# EAGLE board LPP_MainBoard_Gen_1_Ver_1 (EAGLE 7.5.0)
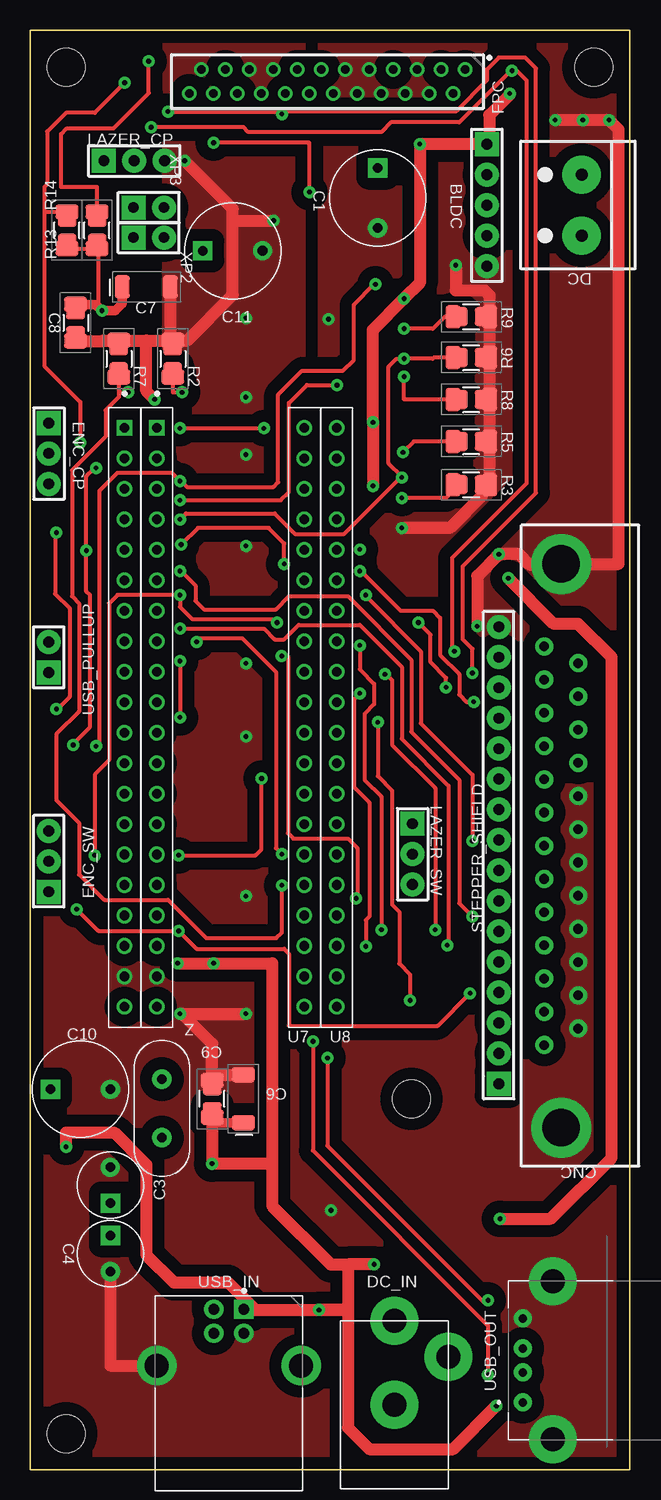
[diagram p0: board, top side]
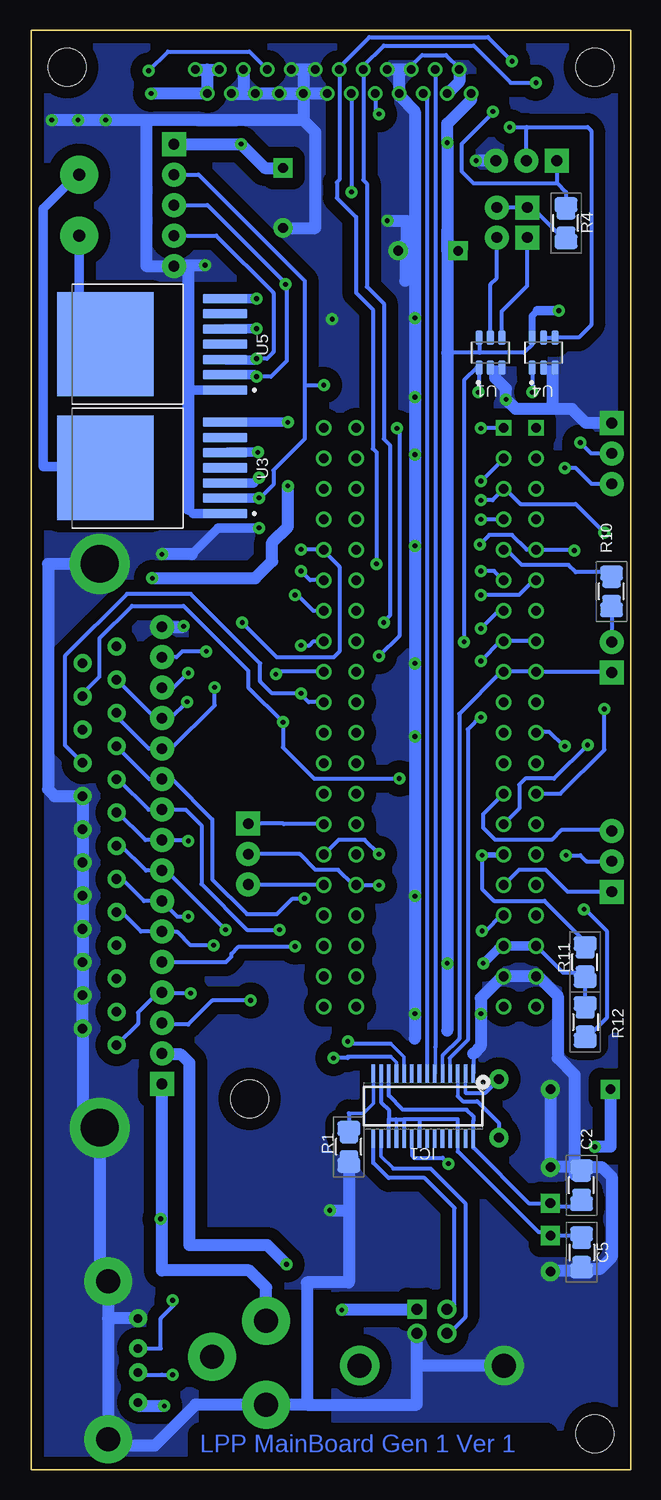
[diagram p1: board, bottom side, seen from below]

Size 50 x 120 mm. Coordinates in mm from the lower left corner, seen from the top.
Outline: 0,120 0,0 50,0 50,120 0,120
Copper layers (1*16): Верхний 0.035mm / dielectric 1.5mm / Нижний 0.035mm
Design rules "default *": minimum track width 10mil, minimum drill 0.61mm, track to track 8mil, track to pad 8mil, pad to pad 8mil, via to via 8mil, smd to smd 8mil, copper to edge 40mil, drill to drill 8mil, minimum pad ring 0mil, minimum via ring 8mil, stop-mask expansion 0mil, vias tented up to drill 31mil, thermal gap 10mil
Net classes: 0 Default: width 0.33 mm, clearance 0.33 mm
Holes 3.15 mm at 3,3 3,116.9 47,116.9 31.8,30.9

## Footprints (pad centres in the part's own frame; a part is rotated, then mirrored left to right if it is on the bottom)
PLS_5 = drill 0.9 pad 2 square: 1 -5.08,0 | drill 0.9 pad 2: 2 -2.54,0; 3 0,0; 4 2.54,0; 5 5.08,0
CAP_P_5mm = drill 0.8 pad 1.6 square: 1 -2.5,0 | drill 0.8 pad 1.6: 2 2.5,0
СAP_0805_1206 = smd 1.26 x 1.92: 1@ -1.525,0; 2@ 1.525,0 | smd 1.21 x 1.57: 1@_1 -0.9,0; 2@_1 0.9,0
CAP_P_3mm = drill 0.8 pad 1.6 square: 1 -1.5,0 | drill 0.8 pad 1.6: 2 1.5,0
CAP_P_3mm_C4 = drill 0.8 pad 1.6 square: 1 -1.5,0 | drill 0.8 pad 1.6: 2 1.5,0
СAP_0805_1206_C5 = smd 1.26 x 1.92: 1@ -1.525,0; 2@ 1.525,0 | smd 1.21 x 1.57: 1@_1 -0.9,0; 2@_1 0.9,0
СAP_P_SMD_5mm = smd 1.26 x 1.92: 1@ -2,0; 2@ 2,0
СAP_P_SMD_5mm_C7 = smd 1.26 x 1.92: 1@ -2,0; 2@ 2,0
СAP_0805_1206_C8 = smd 1.26 x 1.92: 1@ -1.525,0; 2@ 1.525,0 | smd 1.21 x 1.57: 1@_1 -0.9,0; 2@_1 0.9,0
СAP_0805_1206_C9 = smd 1.26 x 1.92: 1@ -1.525,0; 2@ 1.525,0 | smd 1.21 x 1.57: 1@_1 -0.9,0; 2@_1 0.9,0
CAP_P_5mm_C10 = drill 0.8 pad 1.6 square: 1 -2.5,0 | drill 0.8 pad 1.6: 2 2.5,0
CAP_P_5mm_C11 = drill 0.8 pad 1.6 square: 1 -2.5,0 | drill 0.8 pad 1.6: 2 2.5,0
DB25M = drill 0.8 pad 1.5: 1 16.612,1.422; 2 13.843,1.422; 3 11.074,1.422; 4 8.306,1.422; 5 5.537,1.422; 6 2.769,1.422; 7 0,1.422; 8 -2.769,1.422; 9 -5.537,1.422; 10 -8.306,1.422; 11 -11.074,1.422; 12 -13.843,1.422; 13 -16.612,1.422; 14 15.215,-1.422; 15 12.446,-1.422; 16 9.677,-1.422; 17 6.909,-1.422; 18 4.14,-1.422; 19 1.372,-1.422; 20 -1.397,-1.422; 21 -4.166,-1.422; 22 -6.934,-1.422; 23 -9.703,-1.422; 24 -12.471,-1.422; 25 -15.24,-1.422 | drill 3.15 pad 5: @26 23.5,0; @26_1 -23.5,0
2_Screw_Term._Blk. = drill 1 pad 3.175: 1 -2.54,0; 2 2.54,0
J-1 = drill 2 pad 4: 1 7,0; 2 0,0; 3 4,-4.5
PLS_3 = drill 0.9 pad 2 square: 1 -2.54,0 | drill 0.9 pad 2: 2 0,0; 3 2.54,0
PLS_3_ENC_SW = drill 0.9 pad 2 square: 1 -2.54,0 | drill 0.9 pad 2: 2 0,0; 3 2.54,0
FPC_24_1mm = drill 0.7 pad 1.2: 1 -1,12; 2 1,11; 3 -1,10; 4 1,9; 5 -1,8; 6 1,7; 7 -1,6; 8 1,5; 9 -1,4; 10 1,3; 11 -1,2; 12 1,1; 13 -1,0; 14 1,-1; 15 -1,-2; 16 1,-3; 17 -1,-4; 18 1,-5; 19 -1,-6; 20 1,-7; 21 -1,-8; 22 1,-9; 23 -1,-10; 24 1,-11
SOP64P600X175-28N = smd 0.3 x 1.525: 1 -4.16,-2.712; 2 -3.52,-2.712; 3 -2.88,-2.712; 4 -2.24,-2.712; 5 -1.6,-2.712; 6 -0.96,-2.712; 7 -0.32,-2.712; 8 0.32,-2.712; 9 0.96,-2.712; 10 1.6,-2.712; 11 2.24,-2.712; 12 2.88,-2.712; 13 3.52,-2.712; 14 4.16,-2.712; 15 4.16,2.712; 16 3.52,2.712; 17 2.88,2.712; 18 2.24,2.712; 19 1.6,2.712; 20 0.96,2.712; 21 0.32,2.712; 22 -0.32,2.712; 23 -0.96,2.712; 24 -1.6,2.712; 25 -2.24,2.712; 26 -2.88,2.712; 27 -3.52,2.712; 28 -4.16,2.712
PLS_3_LAZER_CP = drill 0.9 pad 2 square: 1 -2.54,0 | drill 0.9 pad 2: 2 0,0; 3 2.54,0
R_0805_1206 = smd 1.26 x 1.92: 1@ -1.525,0; 2@ 1.525,0 | smd 1.21 x 1.57: 1@_1 -0.9,0; 2@_1 0.9,0
R_0805_1206_R2 = smd 1.26 x 1.92: 1@ -1.525,0; 2@ 1.525,0 | smd 1.21 x 1.57: 1@_1 -0.9,0; 2@_1 0.9,0
R_0805_1206_R3 = smd 1.26 x 1.92: 1@ -1.525,0; 2@ 1.525,0 | smd 1.21 x 1.57: 1@_1 -0.9,0; 2@_1 0.9,0
R_0805_1206_R4 = smd 1.26 x 1.92: 1@ -1.525,0; 2@ 1.525,0 | smd 1.21 x 1.57: 1@_1 -0.9,0; 2@_1 0.9,0
R_0805_1206_R10 = smd 1.26 x 1.92: 1@ -1.525,0; 2@ 1.525,0 | smd 1.21 x 1.57: 1@_1 -0.9,0; 2@_1 0.9,0
R_0805_1206_R12 = smd 1.26 x 1.92: 1@ -1.525,0; 2@ 1.525,0 | smd 1.21 x 1.57: 1@_1 -0.9,0; 2@_1 0.9,0
R_0805_1206_R13 = smd 1.26 x 1.92: 1@ -1.525,0; 2@ 1.525,0 | smd 1.21 x 1.57: 1@_1 -0.9,0; 2@_1 0.9,0
R_0805_1206_R14 = smd 1.26 x 1.92: 1@ -1.525,0; 2@ 1.525,0 | smd 1.21 x 1.57: 1@_1 -0.9,0; 2@_1 0.9,0
PLS_16 = drill 0.9 pad 2 square: 1 -19.05,0 | drill 0.9 pad 2: 2 -16.51,0; 3 -13.97,0; 4 -11.43,0; 5 -8.89,0; 6 -6.35,0; 7 -3.81,0; 8 -1.27,0; 9 1.27,0; 10 3.81,0; 11 6.35,0; 12 8.89,0; 13 11.43,0; 14 13.97,0; 15 16.51,0; 16 19.05,0
SOT95P280X145-6N = smd 1.22 x 0.6: 1 -1.245,0.95; 2 -1.245,0; 3 -1.245,-0.95; 4 1.245,-0.95; 5 1.245,0; 6 1.245,0.95
TO127P1500X440-8N = smd 3.67 x 0.79: 1 -6.07,3.81; 2 -6.07,2.54; 3 -6.07,1.27; 4 -6.07,0; 5 -6.07,-1.27; 6 -6.07,-2.54; 7 -6.07,-3.81 | smd 8.04 x 8.67: 8 3.89,0
ST_Pill = drill 0.8 pad 1.3 square: 1 -7.015,24.128 | drill 0.8 pad 1.3: 2 -7.015,21.588; 3 -7.015,19.048; 4 -7.015,16.508; 5 -7.015,13.968; 6 -7.015,11.428; 7 -7.015,8.888; 8 -7.015,6.348; 9 -7.015,3.808; 10 -7.015,1.268; 11 -7.015,-1.272; 12 -7.015,-3.812; 13 -7.015,-6.352; 14 -7.015,-8.892; 15 -7.015,-11.432; 16 -7.015,-13.972; 17 -7.015,-16.512; 18 -7.015,-19.052; 19 -7.015,-21.592; 20 -7.015,-24.132; 21 7.985,-24.132; 22 7.985,-21.592; 23 7.985,-19.052; 24 7.985,-16.512; 25 7.985,-13.972; 26 7.985,-11.432; 27 7.985,-8.892; 28 7.985,-6.352; 29 7.985,-3.812; 30 7.985,-1.272; 31 7.985,1.268; 32 7.985,3.808; 33 7.985,6.348; 34 7.985,8.888; 35 7.985,11.428; 36 7.985,13.968; 37 7.985,16.508; 38 7.985,19.048; 39 7.985,21.588; 40 7.985,24.128
ST_Pill_U8 = drill 0.8 pad 1.3 square: 1 -7.015,24.128 | drill 0.8 pad 1.3: 2 -7.015,21.588; 3 -7.015,19.048; 4 -7.015,16.508; 5 -7.015,13.968; 6 -7.015,11.428; 7 -7.015,8.888; 8 -7.015,6.348; 9 -7.015,3.808; 10 -7.015,1.268; 11 -7.015,-1.272; 12 -7.015,-3.812; 13 -7.015,-6.352; 14 -7.015,-8.892; 15 -7.015,-11.432; 16 -7.015,-13.972; 17 -7.015,-16.512; 18 -7.015,-19.052; 19 -7.015,-21.592; 20 -7.015,-24.132; 21 7.985,-24.132; 22 7.985,-21.592; 23 7.985,-19.052; 24 7.985,-16.512; 25 7.985,-13.972; 26 7.985,-11.432; 27 7.985,-8.892; 28 7.985,-6.352; 29 7.985,-3.812; 30 7.985,-1.272; 31 7.985,1.268; 32 7.985,3.808; 33 7.985,6.348; 34 7.985,8.888; 35 7.985,11.428; 36 7.985,13.968; 37 7.985,16.508; 38 7.985,19.048; 39 7.985,21.588; 40 7.985,24.128
USB-1_Type_B = drill 0.9 pad 1.6 square: 1 1.2,4.66 | drill 0.9 pad 1.6: 2 -1.3,4.66; 3 -1.3,2.66; 4 1.2,2.66 | drill 2 pad 3.3: 5 -6.07,-0.05; 6 5.97,-0.05
USB_Type_A_horizontal = drill 0.7 pad 1.5: 1 -3.5,2.5; 2 -1,2.5; 3 1,2.5; 4 3.5,2.5 | drill 2 pad 4: @5 6.57,0; @5_1 -6.57,0
PLS_2 = drill 0.9 pad 2 square: 1 -1.27,0 | drill 0.9 pad 2: 2 1.27,0
PLS_2_XP2 = drill 0.9 pad 2 square: 1 -1.27,0 | drill 0.9 pad 2: 2 1.27,0
PLS_2_XP3 = drill 0.9 pad 2 square: 1 -1.27,0 | drill 0.9 pad 2: 2 1.27,0
Q_1 = drill 0.8 pad 1.6: 1 -2.44,0; 2 2.44,0

## Placement (x,y rotation side)
BLDC  BLDC SHIELD  [PLS_5]  38.1,105.4 270 top
C1  1000 mf  [CAP_P_5mm]  29,106 270 top
C2  CAP_0805_1206  [СAP_0805_1206]  4.1,23.7 90 bottom
C3  10 mf  [CAP_P_3mm]  6.7,23.7 90 top
C4  10 mf  [CAP_P_3mm_C4]  6.7,18 270 top
C5  CAP_0805_1206  [СAP_0805_1206_C5]  4.1,18.1 270 bottom
C6  CAP_SMD_P_5MM  [СAP_P_SMD_5mm]  17.8,30.9 90 top
C7  CAP_SMD_P_5MM  [СAP_P_SMD_5mm_C7]  9.7,98.6 0 top
C8  CAP_0805_1206  [СAP_0805_1206_C8]  3.8,95.6 270 top
C9  CAP_0805_1206  [СAP_0805_1206_C9]  15.2,30.9 90 top
C10  CAP_P_5MM  [CAP_P_5mm_C10]  4.2,31.7 0 top
C11  CAP_P_5MM  [CAP_P_5mm_C11]  16.9,101.6 0 top
CNC  DB25M  [DB25M]  44.3,52 90 top
DC  DC  [2_Screw_Term._Blk.]  46,105.4 90 top
DC_IN  DC-005-5.5-2.1  [J-1]  30.4,5.4 90 top
ENC_CP  ENC CP  [PLS_3]  1.57,84.7 270 top
ENC_SW  ENC SW  [PLS_3_ENC_SW]  1.57,50.7 90 top
FPC  FPC 24 1mm  [FPC_24_1mm]  24.3,115.7 270 top
IC1  FE1.1S  [SOP64P600X175-28N]  17.3,30.3 180 bottom
LAZER_CP  LAZER_CP  [PLS_3_LAZER_CP]  8.7,109.1 0 top
LAZER_SW  LAZER SW  [PLS_3_LAZER_CP]  31.9,51.3 270 top
R1  2.7 Kom  [R_0805_1206]  23.5,26.9 90 bottom
R2  R_0805_1206  [R_0805_1206_R2]  11.9,92.6 270 top
R3  R_0805_1206  [R_0805_1206_R3]  36.8,82.1 180 top
R4  R_0805_1206  [R_0805_1206_R4]  5.4,103.9 90 bottom
R5  5.1 k  [R_0805_1206_R3]  36.8,85.7 180 top
R6  R_0805_1206  [R_0805_1206_R3]  36.8,92.7 180 top
R7  R_0805_1206  [R_0805_1206_R2]  7.4,92.6 270 top
R8  R_0805_1206  [R_0805_1206_R3]  36.8,89.2 180 top
R9  5.1 k  [R_0805_1206_R3]  36.8,96.1 180 top
R10  1.5 k  [R_0805_1206_R10]  1.6,73.2 90 bottom
R11  R_0805_1206  [R_0805_1206]  3.8,42.3 90 bottom
R12  R_0805_1206  [R_0805_1206_R12]  3.8,37.3 270 bottom
R13  R_0805_1206  [R_0805_1206_R13]  5.6,103.3 90 top
R14  R_0805_1206  [R_0805_1206_R14]  3.1,103.3 90 top
STEPPER_SHIELD  STEPPER SHIELD  [PLS_16]  39.1,51.2 90 top
U1  MAX15070  [SOT95P280X145-6N]  11.7,93.11 90 bottom
U3  BTN7933B  [TO127P1500X440-8N]  39.9,83.5 180 bottom
U4  MAX15070  [SOT95P280X145-6N]  7.27,93.11 90 bottom
U5  BTN7933B  [TO127P1500X440-8N]  39.9,93.8 180 bottom
U7  Pill STM32G431  [ST_Pill]  14.9,62.7 0 top
U8  Blue Pill STM32F103  [ST_Pill_U8]  17.6,62.7 0 top
USB_IN  Type B, Receptacle  [USB-1_Type_B]  16.64,8.7 0 top
USB_OUT  USB OUT  [USB_Type_A_horizontal]  43.6,9.1 90 top
USB_PULLUP  USB PULLUP  [PLS_2]  1.57,67.7 90 top
XP2  BKL SEL  [PLS_2_XP2]  9.9,102.7 0 top
XP3  BKL SEL  [PLS_2_XP3]  9.9,105.2 0 top
Z  12MHz  [Q_1]  11,30.1 270 top

## Library data of the parts
BLDC ENC_CP ENC_SW LAZER_CP LAZER_SW STEPPER_SHIELD USB_PULLUP XP2 XP3 = common; AUTHOR: Даньковский В.И.; MAIL: dvi534538@mail/ru; WEB: http://vinratel.at.ua/
C1-C11 DC DC_IN R1-R14 U7 U8 Z = common
CNC = common; UNIQUE_NAME: TE_DB25M
FPC USB_IN = common; PART_NUMBER_(DIGI-KEY): A123109-ND; UNIQUE_NAME: TE_1734366-4
IC1 = common; AVAILABILITY: In Stock; CHECK_PRICES: https://www.snapeda.com/parts/FE1.1S/Terminus/view-part/?ref=eda; DESCRIPTION: USB 2.0 HIGH SPEED 4-PORT HUB CONTROLLER; MF: terminus; MP: FE1.1S; PACKAGE: None; PRICE: None; SNAPEDA_LINK: https://www.snapeda.com/parts/FE1.1S/Terminus/view-part/?ref=snap
U1 U4 = common; AVAILABILITY: In Stock; CHECK_PRICES: https://www.snapeda.com/parts/MAX15070AAUT+T/Maxim+Integrated/view-part/?ref=eda; DESCRIPTION: Low-Side Gate Driver IC Inverting, Non-Inverting SOT-23-6; MF: Maxim Integrated Products; MP: MAX15070AAUT+T; PACKAGE: SOT-23-6 Maxim Integrated; PRICE: None; SNAPEDA_LINK: https://www.snapeda.com/parts/MAX15070AAUT+T/Maxim+Integrated/view-part/?ref=snap
U3 U5 = common; AVAILABILITY: Not in stock; CHECK_PRICES: https://www.snapeda.com/parts/IFX007T/Infineon/view-part/?ref=eda; DESCRIPTION: Half Bridge Driver DC Motors, General Purpose Power MOSFET PG-TO263-7-1; MF: Infineon Technologies; MP: IFX007T; PACKAGE: TO-263-8 Infineon Technologies; PRICE: None; SNAPEDA_LINK: https://www.snapeda.com/parts/IFX007T/Infineon/view-part/?ref=snap
USB_OUT = common; AVAILABILITY: In Stock; CHECK_PRICES: https://www.snapeda.com/parts/875832010BLF/Amphenol/view-part/?ref=eda; DESCRIPTION: Case material: Thermoplastic UL94V-O; Connection (components): SMD; Connector standard: USB 2.0 type A socket; Connector type: Socket, horizontal mount; Contact material: Copper alloy; Factory colour: White; Pins: 4; Product size (length): 14.50 mm; Product size (width): 14 mm; Type (misc.): 1 Port; MF: Amphenol; MP: 875832010BLF; PACKAGE: None; PRICE: None; SNAPEDA_LINK: https://www.snapeda.com/parts/875832010BLF/Amphenol/view-part/?ref=snap

## Nets
Сеть_0: BLDC.5 C1.2 C2.2@ C2.2@_1 C3.2 C4.2 C5.2@ C5.2@_1 C6.2@ C7.2@ C8.2@ C8.2@_1 C9.2@ C9.2@_1 C10.2 C11.2 CNC.18 CNC.19 CNC.20 CNC.21 CNC.22 CNC.23 CNC.24 CNC.25 CNC.@26 CNC.@26_1 DC_IN.2 ENC_CP.1 FPC.4 FPC.5 FPC.6 FPC.8 FPC.9 FPC.10 FPC.11 FPC.12 FPC.17 FPC.18 FPC.19 FPC.22 FPC.23 IC1.1 LAZER_CP.3 R1.1@ R1.1@_1 R2.1@ R2.1@_1 R3.1@ R3.1@_1 R5.1@ R5.1@_1 R6.1@ R6.1@_1 R7.1@ R7.1@_1 R8.1@ R8.1@_1 R9.1@ R9.1@_1 STEPPER_SHIELD.16 U1.2 U1.3 U3.1 U4.2 U4.3 U5.1 U7.19 U8.19 USB_IN.4 USB_IN.5 USB_OUT.4 USB_OUT.@5 USB_OUT.@5_1
Сеть_1: IC1.3 Z.2
Сеть_2: IC1.2 Z.1
Сеть_3: DC.2 U3.4 U3.8
Сеть_4: R10.2@ R10.2@_1 U8.5
Сеть_5: DC.1 U5.4 U5.8
Сеть_6: ENC_CP.3 FPC.13 R13.2@ R13.2@_1 U7.5 U8.14
Сеть_7: C6.1@ C7.1@ C8.1@ C8.1@_1 C9.1@ C9.1@_1 C10.1 C11.1 FPC.14 FPC.24 IC1.20 R11.1@ R11.1@_1 R12.1@ R12.1@_1 R13.1@ R13.1@_1 R14.1@ R14.1@_1 STEPPER_SHIELD.2 U1.6 U4.6 U7.18 U8.18 USB_IN.1 USB_OUT.1
Сеть_8: IC1.11 USB_OUT.3
Сеть_9: R10.1@ R10.1@_1 USB_PULLUP.2
Сеть_11: IC1.10 USB_OUT.2
Сеть_12: FPC.20 IC1.7
Сеть_13: CNC.3 STEPPER_SHIELD.12 U8.36
Сеть_14: FPC.21 IC1.6
Сеть_15: IC1.16 USB_IN.3
Сеть_16: BLDC.1 C1.1 DC_IN.1 FPC.1 FPC.2 FPC.3 STEPPER_SHIELD.1 U3.7 U5.7
Сеть_17: CNC.13 R12.2@ R12.2@_1 STEPPER_SHIELD.4 U8.17
Сеть_18: R9.2@ R9.2@_1 U5.5
Сеть_19: CNC.5 STEPPER_SHIELD.10 U8.33
Сеть_20: CNC.6 STEPPER_SHIELD.9 U8.34
Сеть_21: CNC.7 STEPPER_SHIELD.8 U8.32
Сеть_22: CNC.8 STEPPER_SHIELD.7 U8.6
Сеть_23: BLDC.4 R6.2@ R6.2@_1 U3.3 U5.3 U8.4
Сеть_24: IC1.15 USB_IN.2
Сеть_25: CNC.9 STEPPER_SHIELD.6 U8.7
Сеть_26: CNC.17 STEPPER_SHIELD.5 U8.31
Сеть_27: ENC_SW.1 U8.16
Сеть_28: ENC_SW.3 U8.13
Сеть_29: CNC.4 STEPPER_SHIELD.11 U8.1
Сеть_30: FPC.7 LAZER_CP.2 STEPPER_SHIELD.15 U4.4 U4.5
Сеть_31: R5.2@ R5.2@_1 U3.5
Сеть_32: CNC.15 R11.2@ R11.2@_1 STEPPER_SHIELD.3 U8.15
Сеть_33: ENC_CP.2 ENC_SW.2 FPC.15 R14.2@ R14.2@_1 U7.6
Сеть_34: BLDC.2 R3.2@ R3.2@_1 U3.2 U7.13 U8.3
Сеть_35: BLDC.3 R8.2@ R8.2@_1 U5.2 U7.11 U8.2
Сеть_36: CNC.2 STEPPER_SHIELD.13 U8.35
Сеть_37: LAZER_SW.2 R7.2@ R7.2@_1 U4.1 U7.25
Сеть_38: R2.2@ R2.2@_1 U1.1 U8.26
Сеть_39: IC1.4 U7.8 U8.8
Сеть_40: IC1.5 U7.9 U8.9 USB_PULLUP.1
Сеть_41: C4.1 C5.1@ C5.1@_1 IC1.13 IC1.17 IC1.18 IC1.19 IC1.21 IC1.26
Сеть_42: C2.1@ C2.1@_1 C3.1 IC1.12 IC1.28
Сеть_43: IC1.14 R1.2@ R1.2@_1
Сеть_44: LAZER_SW.3 U8.25
Сеть_45: LAZER_SW.1 U8.27
Сеть_46: U1.4 XP2.1
Сеть_47: U1.5 XP2.2
Сеть_48: R4.1@ R4.1@_1 XP3.1 XP3.2
Сеть_49: FPC.16 LAZER_CP.1 R4.2@ R4.2@_1 STEPPER_SHIELD.14

## Tracks (layer width: path | path; a pad name or v marks a point on that pad's centre or on a via)
Сеть_0  (via drill 0.4 pad 1)
  Верхний 1: R3.1@_1 37.7,81.2 35,78.5 v31,78.5 | v31,78.5 | v18,38 v12.5,38 12.7,38 15.2,35.5 C9.2@ | v18,38 | v37.3,70.3 37.3,74.5 v39.1,76.3 40.8,76.3 41.7,75.4 44.3,75.4 CNC.@26 49.1,75.5 49.1,111.7 v48.3,112.5 v46.1,112.5 | R3.1@ R5.1@ R8.1@ R6.1@ R9.1@ 38.33,97.88 37.9,98.3 35.5,98.3 v35.5,100.4 | C9.2@_1 15.2,32.9 C6.2@ | R2.1@ 13.12,94.12 16.9,97.9 16.9,104.1 | 16.9,104.1 v20.3,104.1 | 9.7,94.12 R7.1@ 6.12,94.12 6.08,94.08 C8.2@ | 9.7,94.12 R2.1@ | R2.1@ | v10.4,89.2 | v10.4,89.2 9.7,89.9 9.7,94.12 | C7.2@ 11.7,94.12 R2.1@ | v46.1,112.5 | v46.1,112.5 v43.8,112.5 | v43.8,112.5 | C4.2 6.7,8.65 USB_IN.5 | 16.9,104.1 16.9,105.1 v12.9,109.1
  Нижний 0.33: U1.3 U1.2 | U1.2 | U4.3 U4.2 | U4.2 | 13.14,34.66 IC1.1 | U1.2 U1.3 | U1.3 | U4.2 U4.3 | U4.3 | FPC.19 18.3,117 17.4,117.9 15.4,117.9 14.3,116.8 FPC.23
  Нижний 0.8: 36.9,80.1 36.49,79.69 U3.1 | v31,78.5 34.4,78.5 36.6,76.3 | U5.1 36.9,89.99
  Нижний 1: BLDC.5 36.9,100.32 36.9,89.99 36.9,80.1 | C1.2 26.3,103.5 26.3,111.5 27.3,112.5 | 27.3,112.5 40.4,112.5 | 40.4,112.5 40.4,100.32 BLDC.5 | 18,101.6 18,113.2 19.3,114.5 FPC.18 19.3,116.7 | 18,101.6 v18,96 | v18,96 v18,89.4 | v18,89.4 v18,84.6 | v18,84.6 v18,77 | v18,77 v18,67.2 | v18,67.2 v18,61.1 | v18,61.1 v18,47.8 | v18,47.8 v18,38 18,35.9 | v12.5,38 | v12.5,38 12.5,35.3 13.14,34.66 | FPC.11 27.3,116.7 | 27.3,116.7 | 27.3,116.7 FPC.9 | FPC.12 FPC.10 | FPC.10 | FPC.10 FPC.8 | FPC.8 | FPC.8 FPC.6 | FPC.6 | FPC.6 FPC.4 32.3,114.7 FPC.5 | FPC.6 | 27.3,116.7 FPC.10 | FPC.10 | FPC.8 FPC.10 | FPC.10 27.3,112.5 | U8.19 U7.19 7.71,41.11 6.1,39.5 6.1,34.3 4.7,32.9 4.7,24.6 C2.2@_1 | U8.19 | U8.19 10.69,41.11 12.5,39.3 v12.5,38 | 36.6,76.3 v39.1,76.3 | STEPPER_SHIELD.16 37.3,70.25 v37.3,70.3 | C4.2 6.62,16.57 C5.2@ 3.98,16.7 2.6,16.7 1.6,17.7 1.6,24.4 2.42,25.23 C2.2@ 6.67,25.23 C3.2 6.7,27.6 | BLDC.5 37.78,100.32 37.7,100.4 v35.5,100.4 | C11.2 18,101.6 | C10.2 6.7,27.6 | 6.7,27.6 | USB_IN.5 17.84,8.65 USB_IN.4 17.84,5.4 27,5.4 | ENC_CP.1 3.74,87.24 4.9,88.4 6.5,88.4 | 6.5,88.4 9.6,88.4 v10.4,89.2 10.4,90.1 11.3,91 11.3,91.5 | FPC.19 19.3,116.7 | 19.3,116.7 | 19.3,116.7 FPC.17 | v18,61.1 | v18,47.8 | v18,77 | v18,77 | v18,61.1 | v18,47.8 | v18,84.6 | v18,96 | v18,89.4 | v18,67.2 | v20.3,104.1 18.7,104.1 18.7,102.3 C11.2 | C11.2 18.8,101.6 18.8,99.1 | 40.4,112.5 v43.8,112.5 | v43.8,112.5 | v43.8,112.5 v46.1,112.5 | v46.1,112.5 | v46.1,112.5 v48.3,112.5 | v48.3,112.5 | R1.1@ 23.5,21.6 | 23.5,21.6 23.5,15.6 27,15.6 27,5.4 | LAZER_CP.3 v12.9,109.1 | v12.9,109.1 | v12.5,38 | 43.6,12.6 USB_OUT.@5 44.3,16.37 CNC.@26_1 45.72,29.92 CNC.25 CNC.24 CNC.23 CNC.22 CNC.21 CNC.20 CNC.19 CNC.18 48.04,56.14 48.6,56.7 48.6,75.5 CNC.@26
  Нижний 1: 43.6,12.6 USB_OUT.@5_1 43.07,2 39.7,2 36.3,5.4 DC_IN.2 | 6.5,88.4 6.5,91.44 | 27,5.4 DC_IN.2 | DC_IN.2 | v25.1,21.6 23.5,21.6 | USB_OUT.4 43.6,12.6 | FPC.23 14.3,115.7 FPC.22
  other vias: 24.9,95.9
  pour Верхний (isolate 1, rank 5): 0.32,74.68 0.32,0.32 24.68,0.32 24.68,13.32 36.32,13.32 36.32,0.32 49.68,0.32 49.68,119.68 24.32,119.68 24.32,39.68 22.68,39.68 22.68,119.68 11.32,119.68 11.32,74.68
  pour Нижний (isolate 1, rank 5): 0.32,119.68 0.32,0.32 24.68,0.32 24.68,15.32 36.32,15.32 36.32,0.32 49.68,0.32 49.68,77.98 29.68,77.98 29.68,99.32 49.68,99.32 49.68,119.68
Сеть_1
  Нижний 0.3: IC1.3 14.42,31.12
  Нижний 0.33: 14.42,31.12 14,30.7 12.8,30.7 11,28.9 Z.2
Сеть_2
  Нижний 0.3: IC1.2 13.78,31.4
  Нижний 0.33: 13.78,31.4 12.14,31.4 Z.1
Сеть_3
  Нижний 0.8: DC.2 46.16,107.94 49,105.1 49,83.6 43.89,83.6 U3.8
Сеть_4
  Нижний 0.33: R10.2@ 1.9,74.72 1.9,74.8 4.6,74.8 5.2,75.4 9.1,75.4 10.37,76.67 U8.5
Сеть_5
  Нижний 0.8: DC.1 46,96.01 U5.8
Сеть_6  (via drill 0.4 pad 1)
  Верхний 0.33: v3.6,60.4 3.6,60.5 5,61.9 5,72.9 4.7,73.2 v4.7,76.6 | v4.7,76.6 4.7,82.8 5.4,83.5 v5.5,83.5 | R13.2@_1 5.6,106.9 2.6,106.9 2.6,111.33 3.07,111.8 6.97,111.8 9.9,114.73 v9.9,117.4 | v21.2,75.5 21.2,77.2 19.9,78.5 14,78.5 v12.6,77.1 | v4.7,76.6
  Нижний 0.33: v3.6,60.4 6.4,57.6 8.8,57.6 9.3,57.1 9.3,55.09 U8.14 | ENC_CP.3 3.26,82.16 4.6,83.5 v5.5,83.5 | v9.9,117.4 11.9,119.4 21.8,119.4 24.3,116.9 FPC.13 24.3,107.5 24.5,107.3 24.5,106 22.9,104.4 22.9,98.1 21.5,96.7 21.5,85.1 21.2,84.8 v21.2,75.5 | v4.7,76.6 4.7,76.67 U7.5 8.67,76.67 9.9,77.9 11.8,77.9 v12.6,77.1
Сеть_7  (via drill 0.4 pad 1)
  Верхний 0.33: v23.3,106.5 23.3,110.6 v15.3,110.6 | R14.1@ R13.1@ | R13.1@ | R13.1@ 5.7,101.78 5.7,97 6,96.7 v6,96.6
  Верхний 0.8: C9.1@_1 C9.1@ 15.68,28.9 C6.1@ | C7.1@ 7.7,97.2 7.1,96.6 v6,96.6 5.47,97.12 C8.1@ | v15.2,25.5
  Верхний 1: v12.3,42.2 15.36,42.2 | 15.36,42.2 20.2,42.2 20.2,25.5 | 20.2,25.5 v15.2,25.5 C9.1@_1 | 15.36,42.2 v15.3,42.2 | v15.3,42.2 | v3,26.9 3,28.1 7,28.1 9.7,25.4 9.7,17.9 12,15.6 16.5,15.6 18.8,13.3 v24.1,13.3 | v28.7,17.1 26.5,17.1 | 26.5,17.1 26.5,13.3 | 26.5,13.3 v24.1,13.3 | v24.1,13.3 26.5,13.3 | 26.5,13.3 26.5,3.5 28.3,1.7 35.3,1.7 v38.9,5.3 | 20.2,25.5 20.2,22 25.1,17.1 26.5,17.1
  Нижний 0.3: IC1.20 18.26,26.16 18.1,26
  Нижний 0.33: U4.6 8.22,93.78 8.9,93.1 12.6,93.1 | 12.6,93.1 12.6,94.31 U1.6 | FPC.14 v23.3,106.5 | v23.3,106.5 | 18.1,26 15.7,26 v15.2,25.5 | R12.1@_1 R11.1@ | R11.1@_1 5.64,41.4 U7.18 | 12.6,93.1 15.3,93.1
  Нижний 0.6: U4.6 8.22,96.18 7.8,96.6
  Нижний 0.8: U8.18 10.59,43.4 11.1,43.4 v12.3,42.2 | U7.18 U8.18 | U8.18 | C11.1 15.4,101.6 15.4,103.31 15.3,103.31 | 7.8,96.6 v6,96.6 | v15.3,110.6
  Нижний 1: USB_IN.1 17.84,13.3 v24.1,13.3 | 15.3,36.6 v15.3,42.2 15.3,93.1 15.3,103.31 v15.3,110.6 | C10.1 1.7,26.9 v3,26.9 | v28.7,17.1 30.3,18.7 36.8,18.7 36.8,33.9 37.5,34.6 38.82,34.6 38.91,34.69 STEPPER_SHIELD.2 | USB_OUT.1 41.1,5.4 41,5.3 v38.9,5.3 | v15.3,110.6 15.3,112.2 13.3,114.2 FPC.24 | v15.3,110.6
Сеть_8  (via drill 0.4 pad 1)
  Верхний 0.33: v24.8,34.3 24.8,27 37.9,13.9 38.2,13.9 v38.2,14.1
  Нижний 0.3: IC1.11 19.54,33.94 20,34.4
  Нижний 0.33: USB_OUT.3 39.2,10.1 39.2,12.6 37.9,13.9 38.1,14.1 v38.2,14.1 | 20,34.4 23.6,34.4 23.6,34.3 v24.8,34.3
Сеть_9
  Нижний 0.33: R10.1@_1 1.57,72.3 USB_PULLUP.2
Сеть_11  (via drill 0.4 pad 1)
  Верхний 0.33: v23.6,35.7 23.6,26.6 38.2,12 v38.2,7.9
  Нижний 0.3: IC1.10 18.9,34.4 20,35.5
  Нижний 0.33: USB_OUT.2 41.1,8 40.75,7.65 40.5,7.9 39.1,7.9 | 39.1,7.9 | 39.1,7.9 v38.2,7.9 | 20,35.5 23.6,35.5 v23.6,35.7
Сеть_12
  Нижний 0.33: FPC.20 16.98,114.38 IC1.7
Сеть_13  (via drill 0.4 pad 1)
  Верхний 0.33: v34.7,65.2 34.7,66 33.4,67.3 33.4,69.6 v32.4,70.6
  Нижний 0.33: v27.5,76.7 27.47,76.67 U8.36 25.59,76.54 24.3,75.26 24.3,68.17 24.77,67.7 29.5,67.7 v32.4,70.6 | CNC.3 42.88,62.78 40.19,60.09 STEPPER_SHIELD.12 38.31,60.09 34.7,63.7 v34.7,65.2
Сеть_14
  Нижний 0.3: 16.3,35.2 | 16.3,35.2 16.3,33.05 IC1.6
  Нижний 0.33: FPC.21 16.3,35.2
Сеть_15
  Нижний 0.3: IC1.16 20.82,26.12 19.8,25.1
  Нижний 0.33: 19.8,25.1 16.7,25.1 13.8,22.2 13.8,12.7 15.14,11.36 USB_IN.3
Сеть_16  (via drill 0.4 pad 1)
  Верхний 1: v28.6,82 v28.6,87.3 28.6,95 v31.2,97.6 32.5,98.9 v32.5,110.5 32.52,110.48 BLDC.1 38.3,110.48 38.3,112.9 40,114.6 v40,114.7 | v39.2,20.9 43.4,20.9 48.5,26 48.5,67.7 45.7,70.5 43.7,70.5 v39.9,74.3
  Нижний 0.8: v31.2,97.6 U5.7 | v28.6,87.31 33.7,87.31 | 33.7,87.31 | 33.7,87.31 U3.7
  Нижний 1: v28.6,87.3 v28.6,87.31 | BLDC.1 32.48,110.48 | 32.48,110.48 30.5,108.5 C1.1 | v32.5,110.5 32.48,110.48 | FPC.1 35.3,116.7 | 35.3,116.7 | 35.3,116.7 FPC.3 | DC_IN.1 30.4,15.19 31.81,16.6 39.1,16.6 39.1,20.9 | 39.1,20.9 STEPPER_SHIELD.1 | v39.9,74.3 31.31,74.3 29.9,75.71 29.9,77.3 28.6,78.6 v28.6,82 | v39.2,20.9 39.1,20.9 | 35.3,116.7 FPC.2 v40,114.7 | v40,114.7
Сеть_17  (via drill 0.4 pad 1)
  Верхний 0.33: v3.9,46.7 5.7,44.9 v12.4,44.9 13.9,43.4 21.2,43.4 21.6,43 21.6,37 34,37 v36.7,39.7
  Нижний 0.33: v3.9,46.7 3.8,46.7 2,44.9 2,37.64 3.8,35.84 R12.2@ | CNC.13 41.1,37.17 41.1,38.1 39.43,39.77 STEPPER_SHIELD.4 39.03,39.7 v36.7,39.7 | U8.17 10.81,46.19 12.1,44.9 v12.4,44.9
Сеть_18  (via drill 0.4 pad 1)
  Верхний 0.33: R9.2@ 34.6,96.1 33.6,95.1 v31.2,95.1
  Нижний 0.8: v31.2,95.1 33.83,95.1 U5.5
Сеть_19  (via drill 0.4 pad 1)
  Верхний 0.33: v27.5,68.7 27.5,66.7 28.7,65.5 28.7,63.8 27.9,63 27.9,57.5 29.3,56.1 v29.3,45
  Нижний 0.33: CNC.5 42.74,57.54 40.21,55.01 STEPPER_SHIELD.10 37.11,55.01 35.8,53.7 35.8,48.8 32,45 v29.3,45 | v27.5,68.7 26.8,68.7 26.45,69.05 U8.33
Сеть_20  (via drill 0.4 pad 1)
  Верхний 0.33: v28,72.9 28,72.8 32.6,68.2 32.6,62.2 36.9,57.9 v36.9,52.4
  Нижний 0.33: v28,72.9 27.8,72.9 26.49,71.59 U8.34 | CNC.6 42.77,54.77 40.47,52.47 STEPPER_SHIELD.9 36.97,52.47 v36.9,52.4
Сеть_21  (via drill 0.4 pad 1)
  Верхний 0.33: v29.6,66.3 29.7,66.3 30.2,65.8 30.2,60.4 33.8,56.8 v33.8,45
  Нижний 0.33: U8.32 29.6,66.51 v29.6,66.3 | v33.8,45 | v33.8,45 38.73,49.93 STEPPER_SHIELD.8 40.43,49.93 42.5,52 CNC.7
Сеть_22  (via drill 0.4 pad 1)
  Верхний 0.33: v12.5,74.9 12.6,74.9 13.8,73.7 13.8,72.4 14.5,71.7 20.5,71.7 21.6,72.8 26.5,72.8 31.8,67.5 31.8,61.5 35.8,57.5 35.8,47.2 v36.9,46.1
  Нижний 0.33: U8.6 10.63,74.13 11.4,74.9 v12.5,74.9 | CNC.8 42.43,49.23 40.59,47.39 STEPPER_SHIELD.7 37.81,46.1 v36.9,46.1
Сеть_23  (via drill 0.4 pad 1)
  Верхний 0.33: R6.2@ 33.7,92.7 33.6,92.6 v31.2,92.6 30.57,92.6 29.9,91.93 29.9,83.87 31,82.77 v31,82.7 30.9,82.7 26.2,78 22.1,78 20.4,79.7 13,79.7 v12.5,79.2
  Нижний 0.33: 33.76,92.5 33.79,92.53 U5.3 | BLDC.4 34.56,102.86 29.8,98.1 29.8,93.15 30.35,92.6 v31.2,92.6 | U8.4 v12.49,79.21 v12.5,79.2
  Нижний 0.8: v31.2,92.6 31.2,92.5 33.76,92.5 | U3.3 31.47,82.23 v31,82.7
Сеть_24
  Нижний 0.33: USB_IN.2 14.7,13.36 14.7,21.8 17.2,24.3 20.2,24.3 21.46,25.56 IC1.15
Сеть_25  (via drill 0.4 pad 1)
  Верхний 0.33: v12.5,70.1 19.5,70.1 20.4,69.2 21.2,69.2 22.4,70.4 27.5,70.4 31,66.9 31,60.9 34.9,57 34.9,43.7 v34.8,43.7
  Нижний 0.33: U8.7 11.01,71.59 v12.5,70.1 | CNC.9 42.46,46.46 40.85,44.85 STEPPER_SHIELD.6 38.7,44.85 38.65,44.8 37.8,44.8 36.7,43.7 v34.8,43.7
Сеть_26  (via drill 0.4 pad 1)
  Верхний 0.33: v27.5,64.7 27,64.2 27,56.9 28.3,55.6 28.3,46.1 28,45.8 v28,43.6
  Нижний 0.33: U8.31 26.87,63.97 27.5,64.6 v27.5,64.7 29.9,64.7 30.9,65.7 30.9,67.2 36.7,73 42,73 47.2,67.8 47.2,60.39 CNC.17 | STEPPER_SHIELD.5 33.76,42.31 33.3,42.77 33.3,43 32.7,43.6 v28,43.6
Сеть_27
  Нижний 0.33: ENC_SW.1 5.26,48.16 7.1,50 9.31,50 U8.16
Сеть_28
  Нижний 0.33: ENC_SW.3 1.62,53.24 1.68,53.3 5.8,53.3 6.6,52.5 11.3,52.5 12.3,53.5 12.3,54.63 U8.13
Сеть_29  (via drill 0.4 pad 1)
  Верхний 0.33: v12.5,86.8 v19.5,86.8 | v19.5,86.8 | v21,67.8 21.5,67.8 21.5,53.06 21.97,52.59 26.5,52.59 27.3,51.8 27.3,47.6 v27.2,47.6
  Нижний 0.33: U8.1 12.47,86.83 v12.5,86.8 | CNC.4 42.88,60.28 40.15,57.55 STEPPER_SHIELD.11 38.25,57.55 34.9,54.2 34.9,49.2 32,46.3 29.5,46.3 28.2,47.6 v27.2,47.6 | v19.5,86.8 19.3,86.6 19.3,69.5 v21,67.8
Сеть_30  (via drill 0.4 pad 1)
  Верхний 0.33: v35.4,68.2 35.2,68.2 35.2,76 41.4,82.2 41.4,115.8 40.6,116.6 v40.2,116.6 40.1,116.6 35.8,112.3 30.1,112.3 29.3,111.5 18.2,111.5 17.8,111.9 v10.1,111.9
  Нижний 0.33: U4.5 U4.4 4.34,94.36 3.3,95.4 3.3,111.6 3.6,111.9 8.7,111.9 | LAZER_CP.2 8.7,111.9 | v40.2,116.6 38.6,118.2 31.8,118.2 FPC.7 | v35.4,68.2 37.4,68.2 37.89,67.71 STEPPER_SHIELD.15 | v10.1,111.9 8.7,111.9
Сеть_31  (via drill 0.4 pad 1)
  Верхний 0.33: R5.2@_1 32,85.7 v31.1,84.8
  Нижний 0.33: 33.62,84.8 33.83,84.59 U3.5
  Нижний 0.8: v31.1,84.8 33.62,84.8
Сеть_32  (via drill 0.4 pad 1)
  Верхний 0.33: v12.4,51.2 18.8,51.2 19.3,51.7 v19.3,57.6 | v29,62.3 29,57.8 30.2,56.6 30.2,47.1 30.8,46.5 30.8,42.17 31.7,41.27 v31.7,39.1
  Нижний 0.33: v12.4,51.2 10.65,51.2 U8.15 12.4,51.27 12.4,48.4 11.4,47.4 7.2,47.4 3.8,44 R11.2@_1 | CNC.15 45.72,64.68 44.3,66.1 44.3,69.3 41.6,72 37.3,72 31.9,66.6 31.9,65.2 v29,62.3 | v29,62.3 29,60.2 26.4,57.6 v19.3,57.6 | v29,62.3 | v31.7,39.1 34.9,39.1 36.9,37.1 38.97,37.1 STEPPER_SHIELD.3
Сеть_33  (via drill 0.4 pad 1)
  Верхний 0.33: v20.6,70.6 20.6,70.9 13.5,70.9 12.5,71.9 v12.5,72.9 7.3,72.9 6.6,72.2 6.6,59.13 5.4,57.93 v5.4,51.2 | v7.9,115.6 5.4,113.1 3,113.1 1.43,111.53 1.43,107.13 1.2,106.9 1.2,104.83 | 1.2,104.83 1.2,92 4.2,89 v4.2,85.6 | R14.2@ 1.2,104.83
  Нижний 0.33: U7.6 8.09,74.13 9.31,72.9 v12.5,72.9 | v20.6,70.6 20.6,70.67 20.1,71.17 20.1,85.4 20.6,85.9 20.6,97.2 22,98.6 22,107.2 22.3,107.5 FPC.15 22.3,117 20.6,118.7 13.1,118.7 10,115.6 v7.9,115.6 | v5.4,51.2 4.2,51.2 3.7,50.7 ENC_SW.2 | ENC_CP.2 3.3,84.7 v4.2,85.6
Сеть_34  (via drill 0.4 pad 1)
  Верхний 0.33: R3.2@_1 35.8,82.1 34.7,81 v31,81 | v12.5,80.8 20.9,80.8 21.6,81.5 21.6,88.9 23.1,90.4 v25.6,90.4 | v2.2,78.1 2.1,78.1 2.1,73 3.3,71.8 3.3,64.4 2.3,63.4 v2.2,63.4
  Нижний 0.33: 33.42,81 33.46,80.96 | BLDC.2 36.04,107.94 27.2,99.1 27.2,90.4 | 27.2,90.4 27.2,85.9 29.8,83.3 29.8,82.1 30.9,81 v31,81 | 27.2,90.4 v25.6,90.4 | v12.5,80.8 11.53,80.8 U8.3 10.45,81.75 9.2,80.5 4.6,80.5 v2.2,78.1 | U7.13 5.85,56.35 2.2,60 v2.2,63.4
  Нижний 0.8: v31,81 33.42,81 | 33.46,80.96 U3.2
Сеть_35  (via drill 0.4 pad 1)
  Верхний 0.33: R8.2@_1 31.2,89.2 v31.2,91.1 | v28.8,98.8 28.7,98.8 27,97.1 27,92.5 26.1,91.6 22.7,91.6 20.7,89.6 20.7,82.3 20.3,81.9 13.1,81.9 12.6,82.4 v12.5,82.4 11.8,83.1 7.3,83.1 5.8,81.6 5.8,60.3 v5.5,60.3
  Нижний 0.33: 31.36,91.26 v31.2,91.1 30,91.1 28.7,92.4 28.7,98.8 29,99.1 | BLDC.3 35.3,105.4 29,99.1 | U8.2 12.47,82.4 v12.5,82.4 | v28.8,98.8 29,98.8 29,99.1 | v5.5,60.3 5.6,60.3 6.8,61.5 7.76,61.5 7.83,61.43 U7.11
  Нижний 0.8: 31.36,91.26 U5.2
Сеть_36  (via drill 0.4 pad 1)
  Верхний 0.33: v27.5,74.9 27.6,74.9 30.9,71.6 33.6,71.6 34.2,71 34.2,67.9 35.8,66.3 35.8,64.6 36.4,64 v37,64
  Нижний 0.33: U8.35 26.73,74.13 v27.5,74.9 | CNC.2 39.66,62.63 STEPPER_SHIELD.13 38.37,62.63 v37,64
Сеть_37  (via drill 0.4 pad 1)
  Верхний 0.33: R7.2@_1 7.4,89.8 v8.2,89.8 | R7.2@ 7.4,89.4 6.3,88.3 6.3,86.1 3.5,83.3 3.5,72.8 4.1,72.2 4.1,63.2 2.2,61.3 2.2,55.8 4.1,53.9 4.1,49.6 6.2,47.5 11.5,47.5 14.7,44.3 20.53,44.3 21,44.77 v21,48.7
  Нижний 0.33: LAZER_SW.2 27.6,51.3 26.3,50 24.4,50 23.13,48.73 U7.25 22.86,48.7 v21,48.7 | U4.1 8.22,89.82 v8.2,89.8
Сеть_38  (via drill 0.4 pad 1)
  Верхний 0.33: R2.2@_1 11.9,89.8 v12.7,89.8 | v13.9,69 13.9,69.3 17.7,69.3 20.5,66.5 20.5,51.8 v21,51.3
  Нижний 0.33: v12.7,89.8 12.65,89.85 U1.1 12.84,91.86 13.9,90.8 v13.9,69 | v21,51.3 22.2,52.5 24.35,52.5 U8.26
Сеть_39  (via drill 0.4 pad 1)
  Верхний 0.33: v12.5,67.4 v12.5,62.7
  Нижний 0.3: 15.1,34.3 15.1,33.05 IC1.4
  Нижний 0.33: U7.8 U8.8 | U8.8 | U8.8 10.85,69.05 v12.5,67.4 | v12.5,62.7 12.5,62.8 13.6,61.7 13.6,35.8 15.1,34.3
Сеть_40
  Нижний 0.3: 15.7,34.5 IC1.5
  Нижний 0.33: U8.9 U7.9 1.57,66.51 USB_PULLUP.1 | U8.9 | U8.9 10.79,66.51 14.3,63 14.3,35.9 15.7,34.5
Сеть_41
  Нижний 0.3: IC1.18 19.54,29.2 | IC1.26 14.42,26.52
  Нижний 0.33: IC1.26 14.42,29.2 17.62,29.2 | 17.62,29.2 IC1.21 | IC1.17 20.18,29.2 | 20.18,29.2 19.54,29.2 18.9,29.2 | 18.9,29.2 IC1.19 | IC1.13 20.82,30.62 20.18,29.98 20.18,29.2 | 17.62,29.2 18.9,29.2 | C5.1@_1 4.1,19.5 C4.1 7,19.8 7.7,19.8 14.42,26.52
Сеть_42
  Нижний 0.3: IC1.28 13.14,26.84
  Нижний 0.33: IC1.28 13.14,29.06 13.1,29.1 13.1,29.4 13.7,30 19,30 20.18,31.18 IC1.12 | C2.1@_1 4.1,21.9 6.33,21.9 6.63,22.2 C3.1 8.5,22.2 13.14,26.84
Сеть_43
  Нижний 0.3: IC1.14 21.46,30.54 22.3,29.7 23.5,29.7
  Нижний 0.33: 23.5,29.7 R1.2@_1
Сеть_44
  Нижний 0.33: U8.25 31.9,48.73 LAZER_SW.3
Сеть_45
  Нижний 0.33: U8.27 28.94,53.81 28.97,53.84 LAZER_SW.1
Сеть_46
  Нижний 0.33: U1.4 10.75,96.55 8.63,98.67 XP2.1
Сеть_47
  Нижний 0.33: U1.5 11.7,98.8 11.17,99.33 XP2.2
Сеть_48
  Нижний 0.33: R4.1@_1 6,103 8.2,105.2 XP3.1 XP3.2 | XP3.2
Сеть_49  (via drill 0.4 pad 1)
  Верхний 0.33: v21,113 21,113.2 v11.5,113.2 35.5,113.2 38.1,115.8 38.1,116.7 39.1,117.7 41.3,117.7 42.2,116.8 42.2,81.4 36.1,75.3 36.1,69.2 36.9,68.4 v36.9,66.4
  Нижний 0.33: R4.2@_1 5.4,106.5 6.16,107.26 LAZER_CP.1 6.16,107.2 13.1,107.2 14.1,108.2 14.1,110.51 11.5,113.11 v11.5,113.2 | FPC.16 21.3,113 v21,113 | v21,113 | STEPPER_SHIELD.14 38.13,65.17 v36.9,66.4

## Text on the board
Нижний: LPP MainBoard Gen 1 Ver 1
tPlace: FPC | LAZER_CP | XP3 | C1 | BLDC | R14 | XP2 | R13 | DC | C7 | R9 | C8 | C11 | R6 | R7 | R2 | R8 | ENC_CP | R5 | R3 | USB_PULLUP | LAZER_SW | ENC_SW | STEPPER_SHIELD | Z | U7 | U8 | C10 | C9 | C6 | CNC | C3 | C4 | USB_IN | DC_IN | USB_OUT
bPlace: R4 | U5 | U4 | U1 | U3 | R10 | R11 | R12 | C2 | IC1 | R1 | C5